# EAGLE board inputProtection (EAGLE 9.6.2)
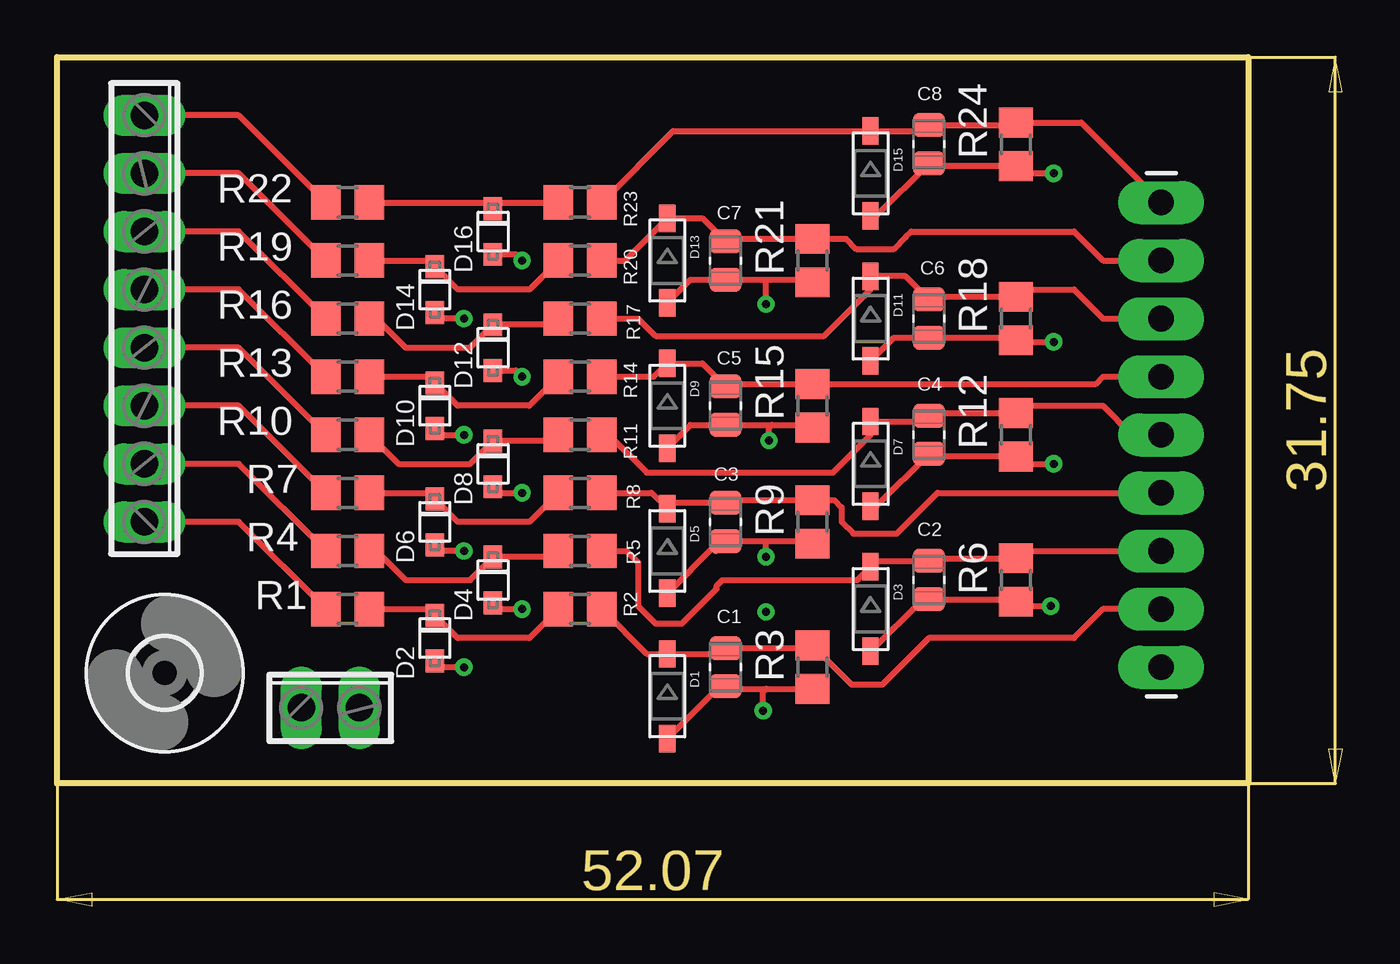
[diagram p0: board, top side]
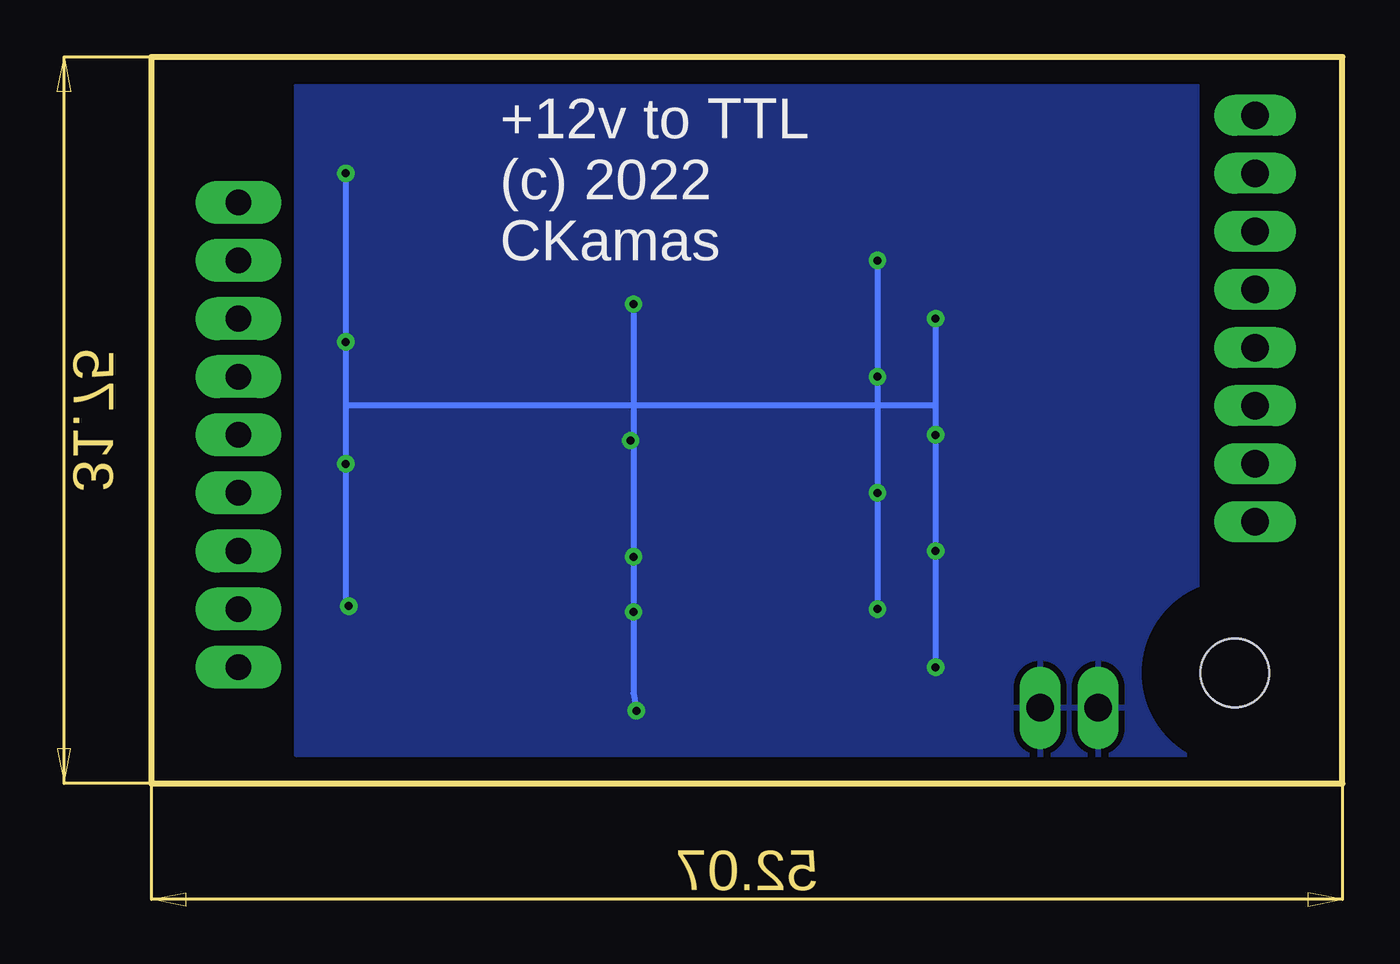
[diagram p1: board, bottom side, seen from below]

Size 52.07 x 31.75 mm. Coordinates in mm from the lower left corner, seen from the top.
Outline: 0,31.75 52.07,31.75 52.07,0 0,0 0,31.75
Copper layers (1*16): Top 0.035mm / dielectric 1.5mm / Bottom 0.035mm
Design rules "default": minimum track width 6mil, minimum drill 0.35mm, track to track 6mil, track to pad 6mil, pad to pad 6mil, via to via 6mil, smd to smd 6mil, copper to edge 40mil, drill to drill 6mil, minimum pad ring 10mil, minimum via ring 8mil, stop-mask expansion 4mil, vias tented up to drill 0mil, thermal gap 10mil

## Footprints (pad centres in the part's own frame; a part is rotated, then mirrored left to right if it is on the bottom)
CAP_0805 = smd 1.05 x 1.38: 1 -0.84,0; 2 0.84,0
SOD-123 = smd 1.2 x 0.7: A 1.85,0; C -1.85,0
SOD-323F = smd 1 x 0.8: A -1,0; C 1,0
3,0 = hole 3: 0,0
1X09_LONGPADS = drill 1.118 pad 1.88 long: 1 0,0; 2 2.54,0; 3 5.08,0; 4 7.62,0; 5 10.16,0; 6 12.7,0; 7 15.24,0; 8 17.78,0; 9 20.32,0
R0805 = smd 1.3 x 1.5: 1 -0.95,0; 2 0.95,0
8POL254 = drill 1.2 long: 1 -8.89,0; 2 -6.35,0; 3 -3.81,0; 4 -1.27,0; 5 1.27,0; 6 3.81,0; 7 6.35,0; 8 8.89,0
2POL254 = drill 1.2 long: 1 -1.27,0; 2 1.27,0

## Placement (x,y rotation side)
C1  CC0805KRX7R9BB104  [CAP_0805]  29.21,5.08 270 top
C2  CC0805KRX7R9BB104  [CAP_0805]  38.1,8.89 270 top
C3  CC0805KRX7R9BB104  [CAP_0805]  29.21,11.43 270 top
C4  CC0805KRX7R9BB104  [CAP_0805]  38.1,15.24 270 top
C5  CC0805KRX7R9BB104  [CAP_0805]  29.21,16.51 270 top
C6  CC0805KRX7R9BB104  [CAP_0805]  38.1,20.32 270 top
C7  CC0805KRX7R9BB104  [CAP_0805]  29.21,22.86 270 top
C8  CC0805KRX7R9BB104  [CAP_0805]  38.1,27.94 270 top
D1  BZT52C4V7-13FDICT-ND  [SOD-123]  26.67,3.81 270 top
D2  BAS70WS_R1_00001  [SOD-323F]  16.51,6.35 90 top
D3  BZT52C4V7-13FDICT-ND  [SOD-123]  35.56,7.62 270 top
D4  BAS70WS_R1_00001  [SOD-323F]  19.05,8.89 90 top
D5  BZT52C4V7-13FDICT-ND  [SOD-123]  26.67,10.16 270 top
D6  BAS70WS_R1_00001  [SOD-323F]  16.51,11.43 90 top
D7  BZT52C4V7-13FDICT-ND  [SOD-123]  35.56,13.97 270 top
D8  BAS70WS_R1_00001  [SOD-323F]  19.05,13.97 90 top
D9  BZT52C4V7-13FDICT-ND  [SOD-123]  26.67,16.51 270 top
D10  BAS70WS_R1_00001  [SOD-323F]  16.51,16.51 90 top
D11  BZT52C4V7-13FDICT-ND  [SOD-123]  35.56,20.32 270 top
D12  BAS70WS_R1_00001  [SOD-323F]  19.05,19.05 90 top
D13  BZT52C4V7-13FDICT-ND  [SOD-123]  26.67,22.86 270 top
D14  BAS70WS_R1_00001  [SOD-323F]  16.51,21.59 90 top
D15  BZT52C4V7-13FDICT-ND  [SOD-123]  35.56,26.67 270 top
D16  BAS70WS_R1_00001  [SOD-323F]  19.05,24.13 90 top
H1  MOUNT-HOLE3.0  [3,0]  4.7,4.83 0 top
J1  holes  [1X09_LONGPADS]  48.26,25.4 270 top
R1  10 RHM10KCT-ND  [R0805]  12.7,7.62 0 top
R2  1k RHM1.0KKCT-ND  [R0805]  22.86,7.62 0 top
R3  10k RHM10KKCT-ND  [R0805]  33.02,5.08 90 top
R4  10 RHM10KCT-ND  [R0805]  12.7,10.16 0 top
R5  1k RHM1.0KKCT-ND  [R0805]  22.86,10.16 0 top
R6  10k RHM10KKCT-ND  [R0805]  41.91,8.89 90 top
R7  10 RHM10KCT-ND  [R0805]  12.7,12.7 0 top
R8  1k RHM1.0KKCT-ND  [R0805]  22.86,12.7 0 top
R9  10k RHM10KKCT-ND  [R0805]  33.02,11.43 90 top
R10  10 RHM10KCT-ND  [R0805]  12.7,15.24 0 top
R11  1k RHM1.0KKCT-ND  [R0805]  22.86,15.24 0 top
R12  10k RHM10KKCT-ND  [R0805]  41.91,15.24 90 top
R13  10 RHM10KCT-ND  [R0805]  12.7,17.78 0 top
R14  1k RHM1.0KKCT-ND  [R0805]  22.86,17.78 0 top
R15  10k RHM10KKCT-ND  [R0805]  33.02,16.51 90 top
R16  10 RHM10KCT-ND  [R0805]  12.7,20.32 0 top
R17  1k RHM1.0KKCT-ND  [R0805]  22.86,20.32 0 top
R18  10k RHM10KKCT-ND  [R0805]  41.91,20.32 90 top
R19  10 RHM10KCT-ND  [R0805]  12.7,22.86 0 top
R20  1k RHM1.0KKCT-ND  [R0805]  22.86,22.86 0 top
R21  10k RHM10KKCT-ND  [R0805]  33.02,22.86 90 top
R22  10 RHM10KCT-ND  [R0805]  12.7,25.4 0 top
R23  1k RHM1.0KKCT-ND  [R0805]  22.86,25.4 0 top
R24  10k RHM10KKCT-ND  [R0805]  41.91,27.94 90 top
X1  277-7678-ND  [8POL254]  3.81,20.32 270 top
X2  277-6156-ND  [2POL254]  11.94,3.3 0 top

## Library data of the parts
C1-C8 = Resistor_Capacitor; CREATED_BY: PCBLayout.com; DIGIKEY_PART_NUMBER: ECH-U1C103JX5; MANUFACTURER: Yageo; MPN: ECH-U1C103JX5; PACKAGE: SMD 0805
D1-D16 = adafruit
H1 = holes
J1 = SparkFun-Connectors
R1-R24 = rcl; SPICEPREFIX: R
X1 X2 = con-phoenix-254; OC_FARNELL: unknown; OC_NEWARK: unknown

## Nets
GND: C1.2 C2.2 C3.2 C4.2 C5.2 C6.2 C7.2 C8.2 D1.A D2.A D3.A D4.A D5.A D6.A D7.A D8.A D9.A D10.A D11.A D12.A D13.A D14.A D15.A D16.A R3.1 R6.1 R9.1 R12.1 R15.1 R18.1 R21.1 R24.1 X2.1 X2.2
N$1: D2.C R1.2 R2.1
N$2: C1.1 D1.C J1.8 R2.2 R3.2
N$3: D4.C R4.2 R5.1
N$4: C2.1 D3.C J1.7 R5.2 R6.2
N$5: D6.C R7.2 R8.1
N$6: C3.1 D5.C J1.6 R8.2 R9.2
N$7: D8.C R10.2 R11.1
N$8: C4.1 D7.C J1.5 R11.2 R12.2
N$9: D10.C R13.2 R14.1
N$10: C5.1 D9.C J1.4 R14.2 R15.2
N$11: D12.C R16.2 R17.1
N$12: C6.1 D11.C J1.3 R17.2 R18.2
N$13: D14.C R19.2 R20.1
N$14: C7.1 D13.C J1.2 R20.2 R21.2
N$15: D16.C R22.2 R23.1
N$16: C8.1 D15.C J1.1 R23.2 R24.2
N$17: R1.1 X1.8
N$18: R4.1 X1.7
N$19: R7.1 X1.6
N$20: R10.1 X1.5
N$21: R13.1 X1.4
N$22: R16.1 X1.3
N$23: R19.1 X1.2
N$24: R22.1 X1.1

## Tracks (layer width: path | path; a pad name or v marks a point on that pad's centre or on a via)
GND  (via drill 0.35)
  Top 0.254: D16.A 20.05,23.13 v20.32,22.86 | v17.78,20.32 16.78,20.32 D14.A | D12.A 20.05,18.05 v20.32,17.78 | D10.A 16.78,15.24 v17.78,15.24 18.03,15.24 | D8.A 19.32,12.7 v20.32,12.7 | D6.A 16.78,10.16 v17.78,10.16 18.03,10.16 | D4.A 19.32,7.62 v20.32,7.62 | D2.A 16.78,5.08 v17.78,5.08 | D1.A 28.95,4.24 C1.2 29.32,4.13 30.99,4.13 | 30.99,4.13 R3.1 | D3.A 37.84,8.05 C2.2 41.8,8.05 R6.1 42.1,7.75 v43.43,7.75 | 30.99,10.59 C3.2 29,10.38 | 30.99,10.59 32.91,10.59 R9.1 | D9.A 27.68,15.67 C5.2 31.24,15.67 | 31.24,15.67 32.91,15.67 R15.1 | D11.A 36.57,19.48 C6.2 41.8,19.48 R18.1 41.98,19.3 v43.56,19.3 | D15.A 35.82,24.82 C8.2 38.21,26.99 R24.1 42.23,26.67 v43.56,26.67 | v43.56,13.97 42.23,13.97 R12.1 38.21,14.29 C4.2 35.82,12.12 D7.A | D13.A 27.68,22.02 C7.2 30.99,22.02 | 30.99,22.02 32.91,22.02 R21.1 | 29,10.38 28.78,10.16 | v30.86,3.18 30.86,4 30.99,4.13 | v30.99,9.91 30.99,10.59 | v31.12,14.99 31.12,15.54 31.24,15.67 | v30.99,20.96 30.99,22.02 | D5.A 28.73,10.38 29,10.38
  Bottom 0.254: v17.78,20.32 17.78,16.51 | 17.78,16.51 v17.78,5.08 | v20.32,22.86 v20.32,7.62 | v43.56,26.67 v43.56,19.3 43.56,16.51 | v43.43,7.75 43.56,7.87 43.56,16.51 | v30.99,20.96 30.99,3.94 v30.86,3.18 | 17.78,16.51 43.56,16.51
  other vias: 30.99,7.49
  pour Bottom: 6.35,30.48 45.72,30.48 45.72,2.54 45.72,1.27 7.62,1.27 6.35,1.27
N$1
  Top 0.254: R1.2 16.24,7.62 D2.C 17.51,6.35 20.64,6.35 R2.1
N$2
  Top 0.254: R2.2 25.77,5.66 D1.C 28.95,5.66 C1.1 32.91,5.92 R3.2 34.73,4.32 36.07,4.32 38.1,6.35 44.45,6.35 45.72,7.62 J1.8
N$3
  Top 0.254: R5.1 21.64,9.89 D4.C 18.05,8.89 15.24,8.89 13.97,10.16 R4.2
N$4
  Top 0.254: J1.7 42.23,10.16 R6.2 38.21,9.84 C2.1 35.82,9.73 D3.C 34.98,8.89 29.08,8.89 28.83,8.64 28.83,8.51 27.3,6.98 26.16,6.98 25.4,7.75 25.4,9.65 24.89,10.16 R5.2
N$5
  Top 0.254: R7.2 16.24,12.7 D6.C 17.51,11.43 20.64,11.43 R8.1
N$6
  Top 0.254: R8.2 25.98,12.7 D5.C 26.93,12.27 C3.1 29.32,12.38 R9.2 33.98,12.38 34.29,12.07 34.29,11.43 34.8,10.92 36.7,10.92 38.48,12.7 J1.6
N$7
  Top 0.254: R11.1 21.64,14.97 D8.C 18.05,13.97 14.92,13.97 R10.2
N$8
  Top 0.254: R11.2 24.13,15.24 25.78,13.59 33.91,13.59 35.56,15.24 D7.C 37.84,15.82 C4.1 38.21,16.19 R12.2 42.23,16.51 45.72,16.51 46.99,15.24 J1.5
N$9
  Top 0.254: R13.2 16.24,17.78 D10.C 17.51,16.51 20.64,16.51 R14.1
N$10
  Top 0.254: R14.2 26.09,17.78 D9.C 28.2,18.36 C5.1 29.32,17.46 R15.2 45.4,17.46 45.72,17.78 J1.4
N$11
  Top 0.254: R16.2 13.97,20.32 15.24,19.05 18.05,19.05 D12.C 21.64,20.05 R17.1
N$12
  Top 0.254: R17.2 25.4,20.32 26.16,19.56 33.53,19.56 35.56,21.59 D11.C 37.09,22.17 C6.1 38.21,21.27 R18.2 42.23,21.59 44.45,21.59 45.72,20.32 J1.3
N$13
  Top 0.254: R19.2 16.24,22.86 D14.C 17.51,21.59 20.64,21.59 R20.1
N$14
  Top 0.254: R20.2 24.82,22.86 D13.C 28.2,24.71 C7.1 29.32,23.81 R21.2 34.48,23.81 34.93,23.37 36.58,23.37 37.08,23.88 37.34,24.13 44.45,24.13 45.72,22.86 J1.2
N$15
  Top 0.254: R22.2 18.78,25.4 D16.C 19.32,25.4 R23.1
N$16
  Top 0.254: R23.2 26.93,28.52 D15.C 37.84,28.52 C8.1 41.8,28.78 R24.2 44.77,28.89 J1.1
N$17
  Top 0.254: X1.8 7.94,11.43 R1.1
N$18
  Top 0.254: X1.7 7.94,13.97 R4.1
N$19
  Top 0.254: X1.6 7.94,16.51 R7.1
N$20
  Top 0.254: X1.5 7.94,19.05 R10.1
N$21
  Top 0.254: X1.4 7.94,21.59 R13.1
N$22
  Top 0.254: X1.3 7.94,24.13 R16.1
N$23
  Top 0.254: X1.2 7.94,26.67 R19.1
N$24
  Top 0.254: R22.1 7.94,29.21 X1.1

## Text on the board
bPlace: +12v to TTL / (c) 2022 / CKamas